# Altium PCB Delaytuning.PcbDoc
Units mm, origin at the board's own origin, x right, y up, seen from the top; angles counter-clockwise.
Board outline 152.4 x 101.6 mm, 6 copper layers (Top Layer, Int1 (GND), Int2 (Sign), Int3 (Sign), Int4 (PWR), Bottom Layer), stack 1.551 mm thick; 4 components, 20 nets, 40 pads, 58 vias.
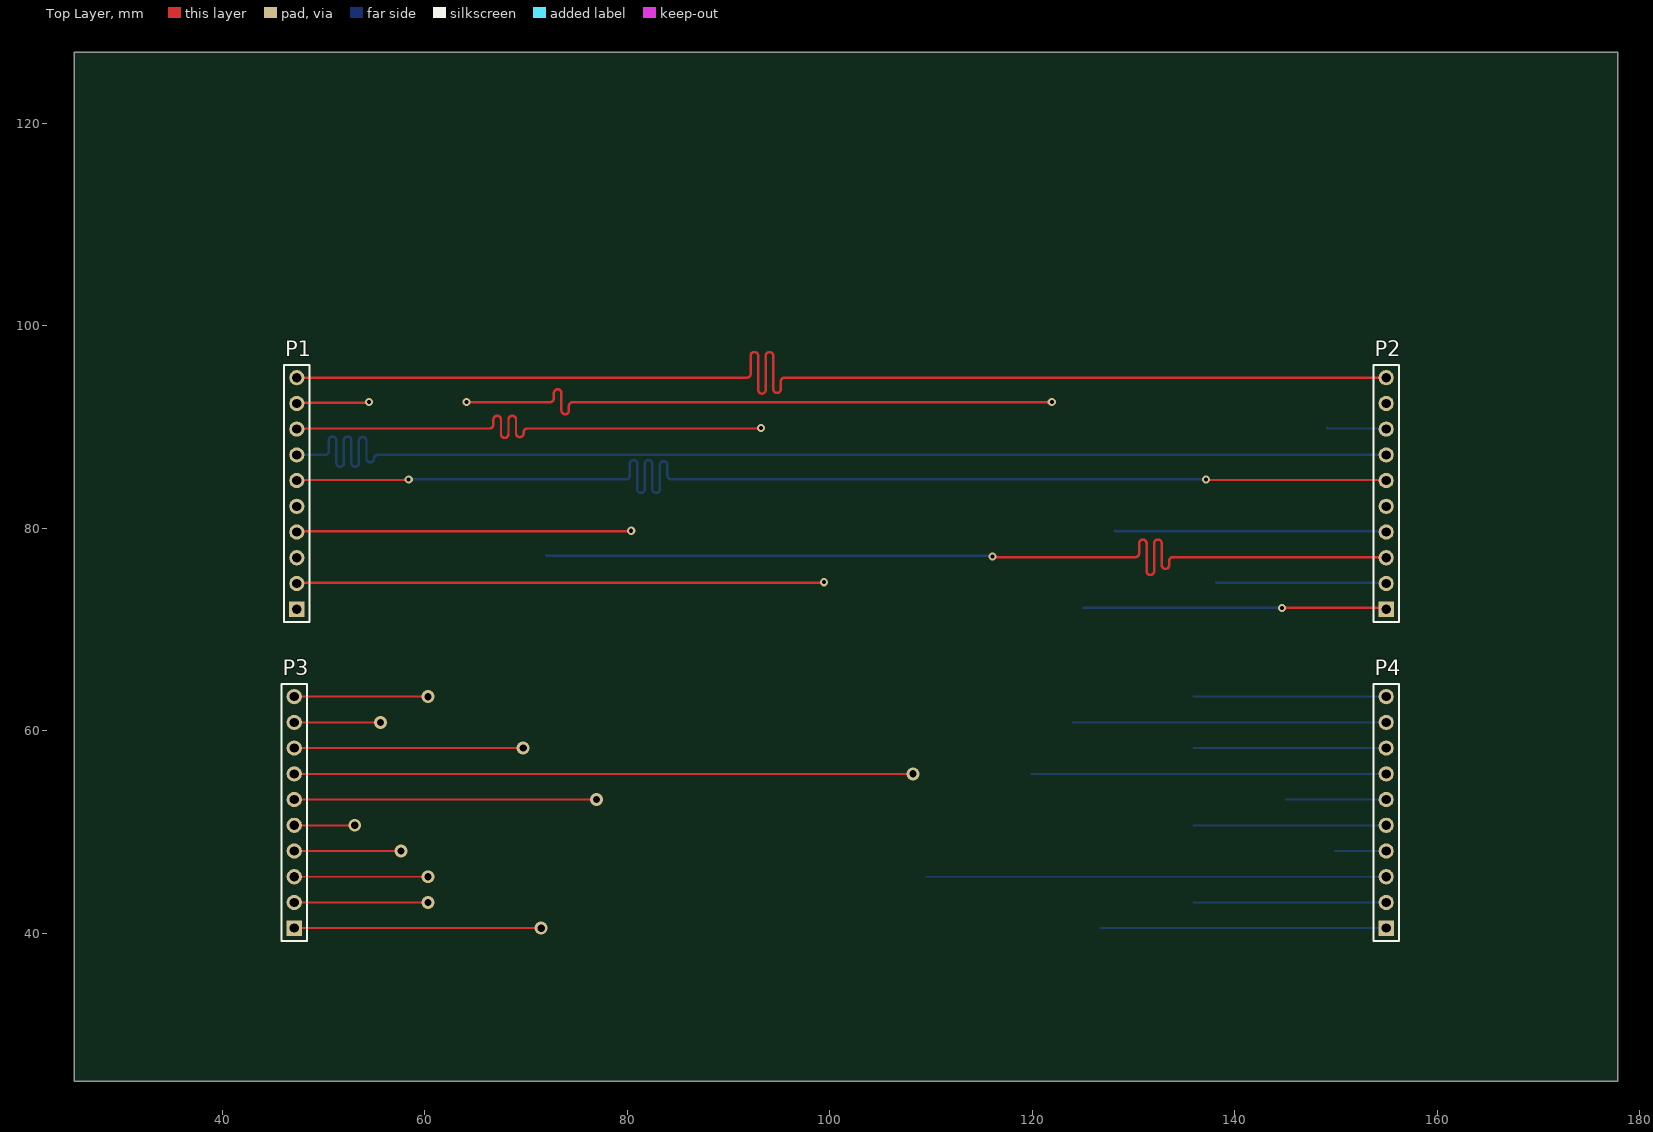
[diagram p0: Top Layer view]
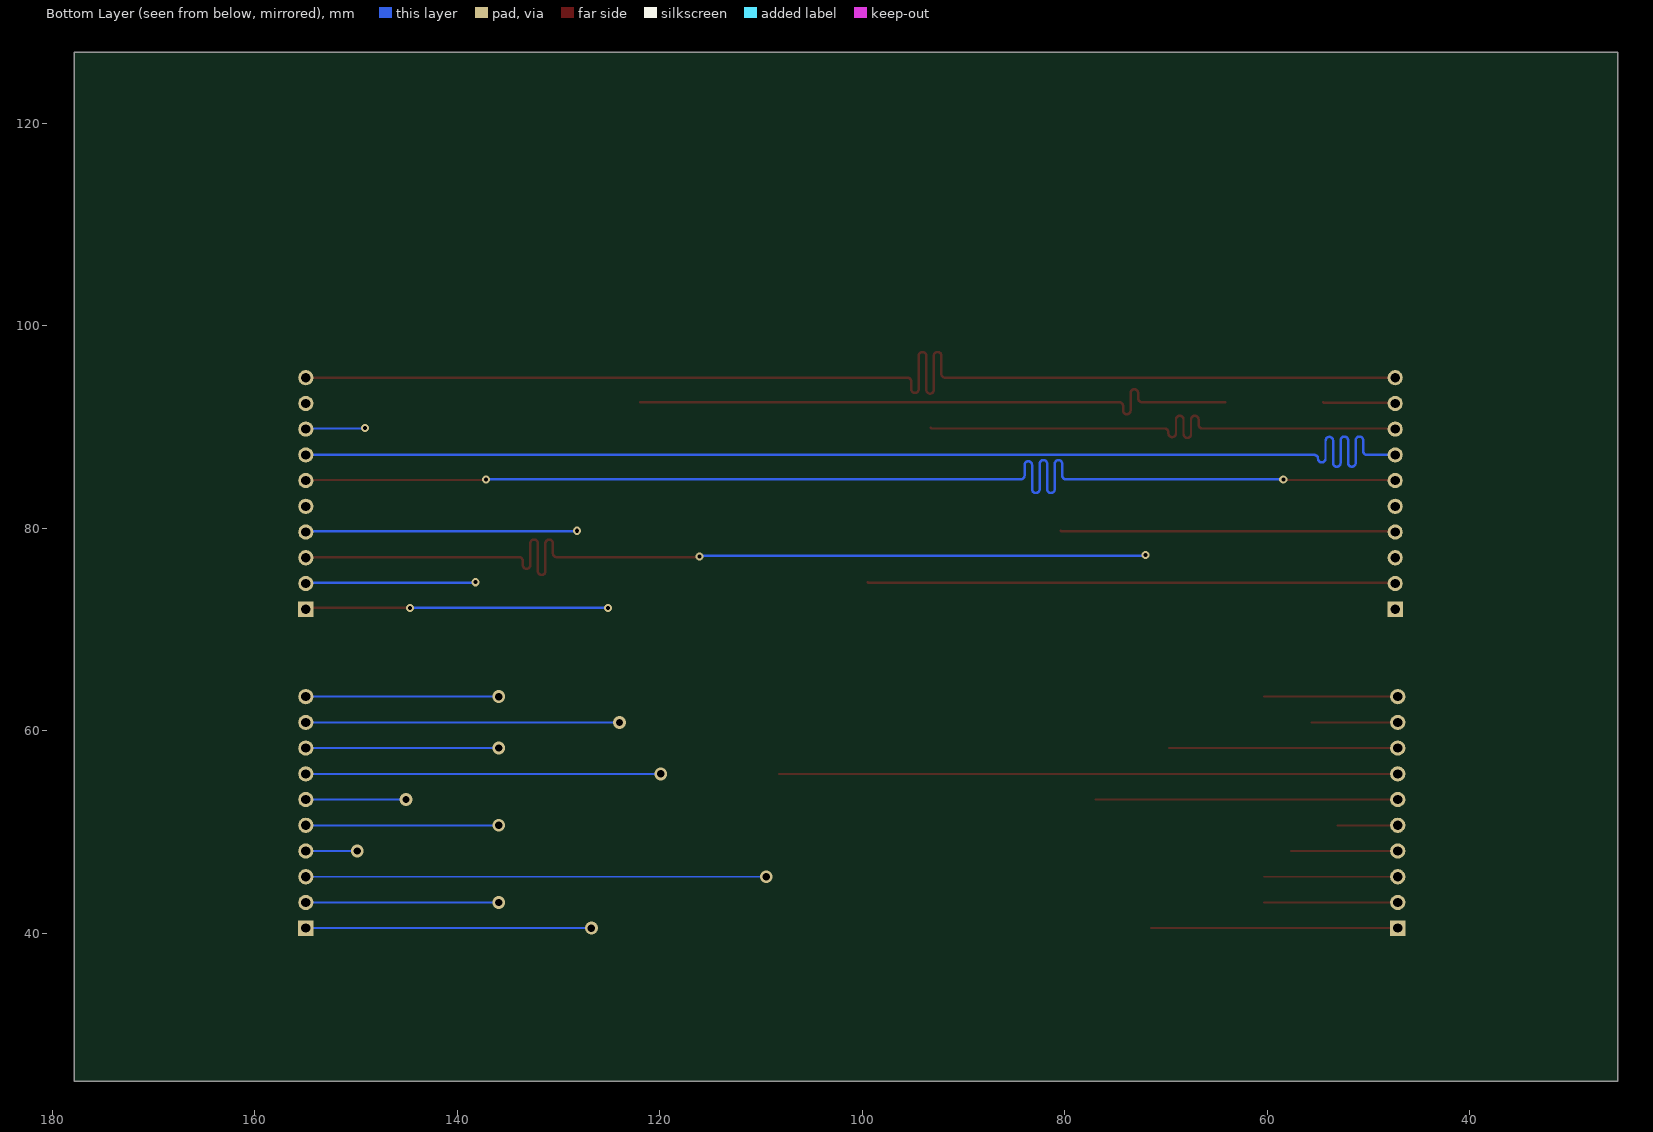
[diagram p1: Bottom Layer view, seen from below]
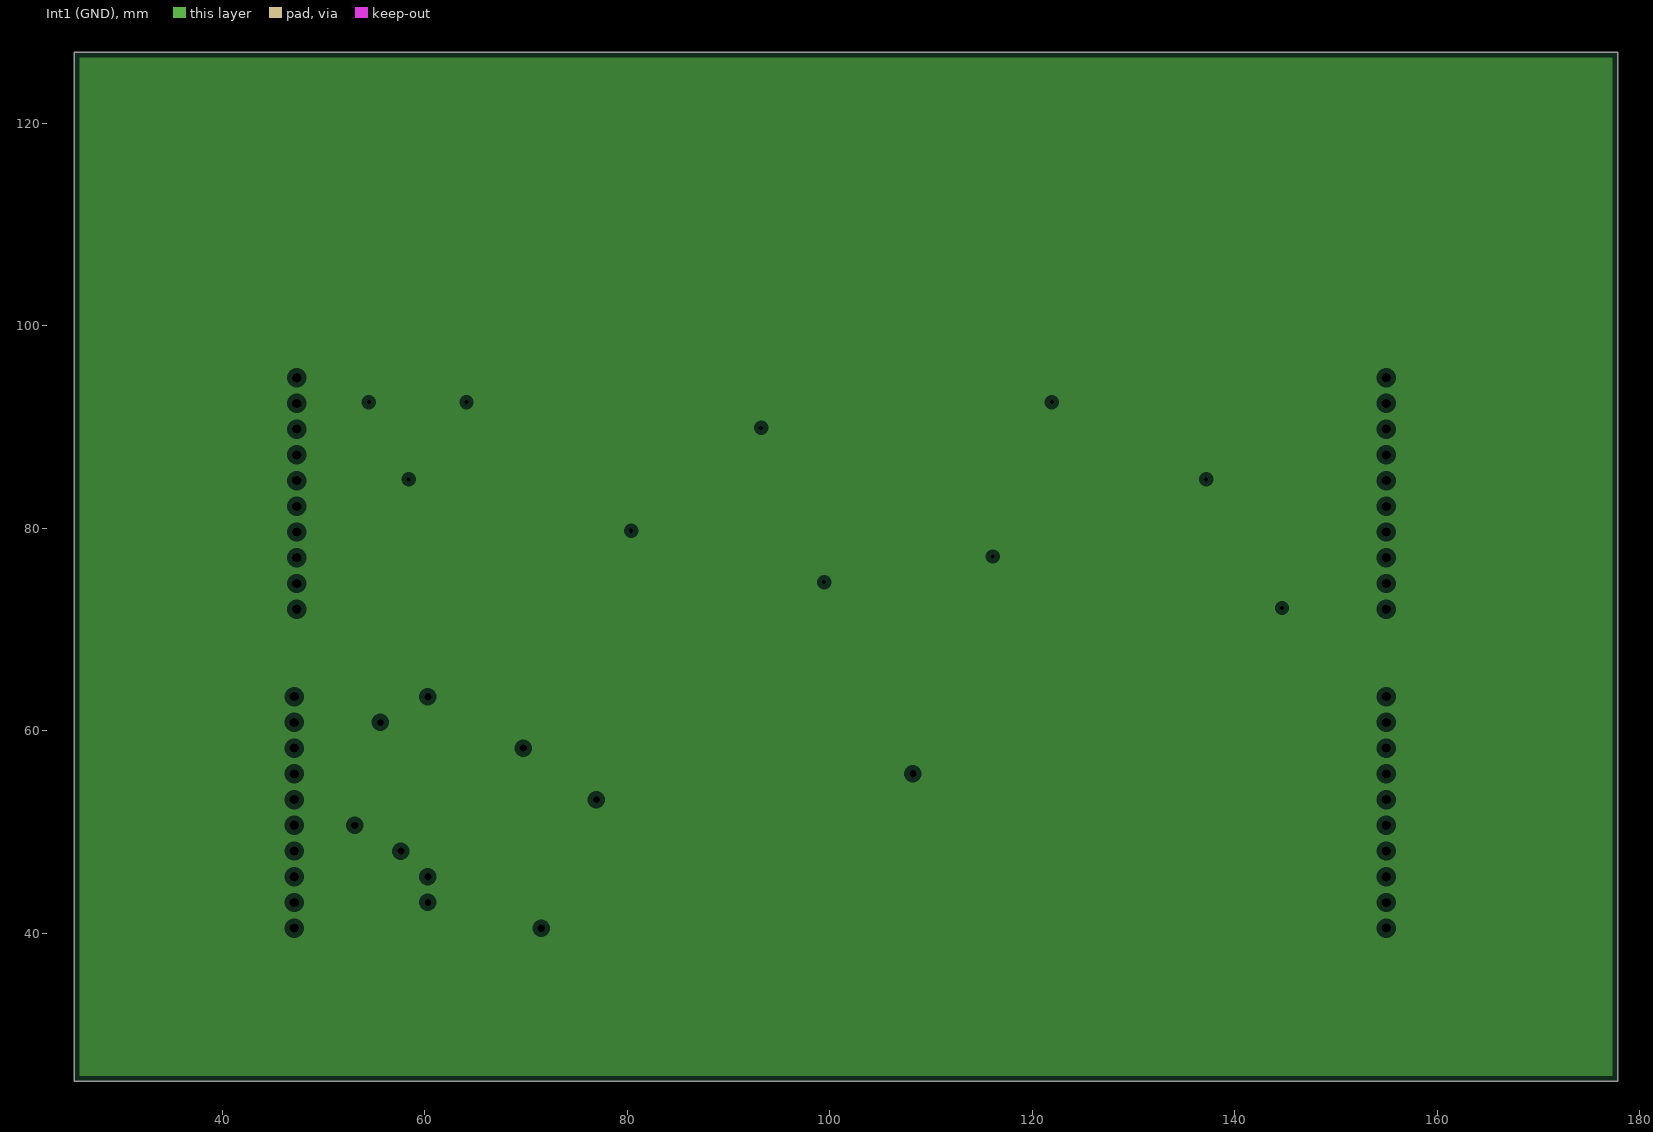
[diagram p2: Int1 (GND), clearances drawn from the general rule]
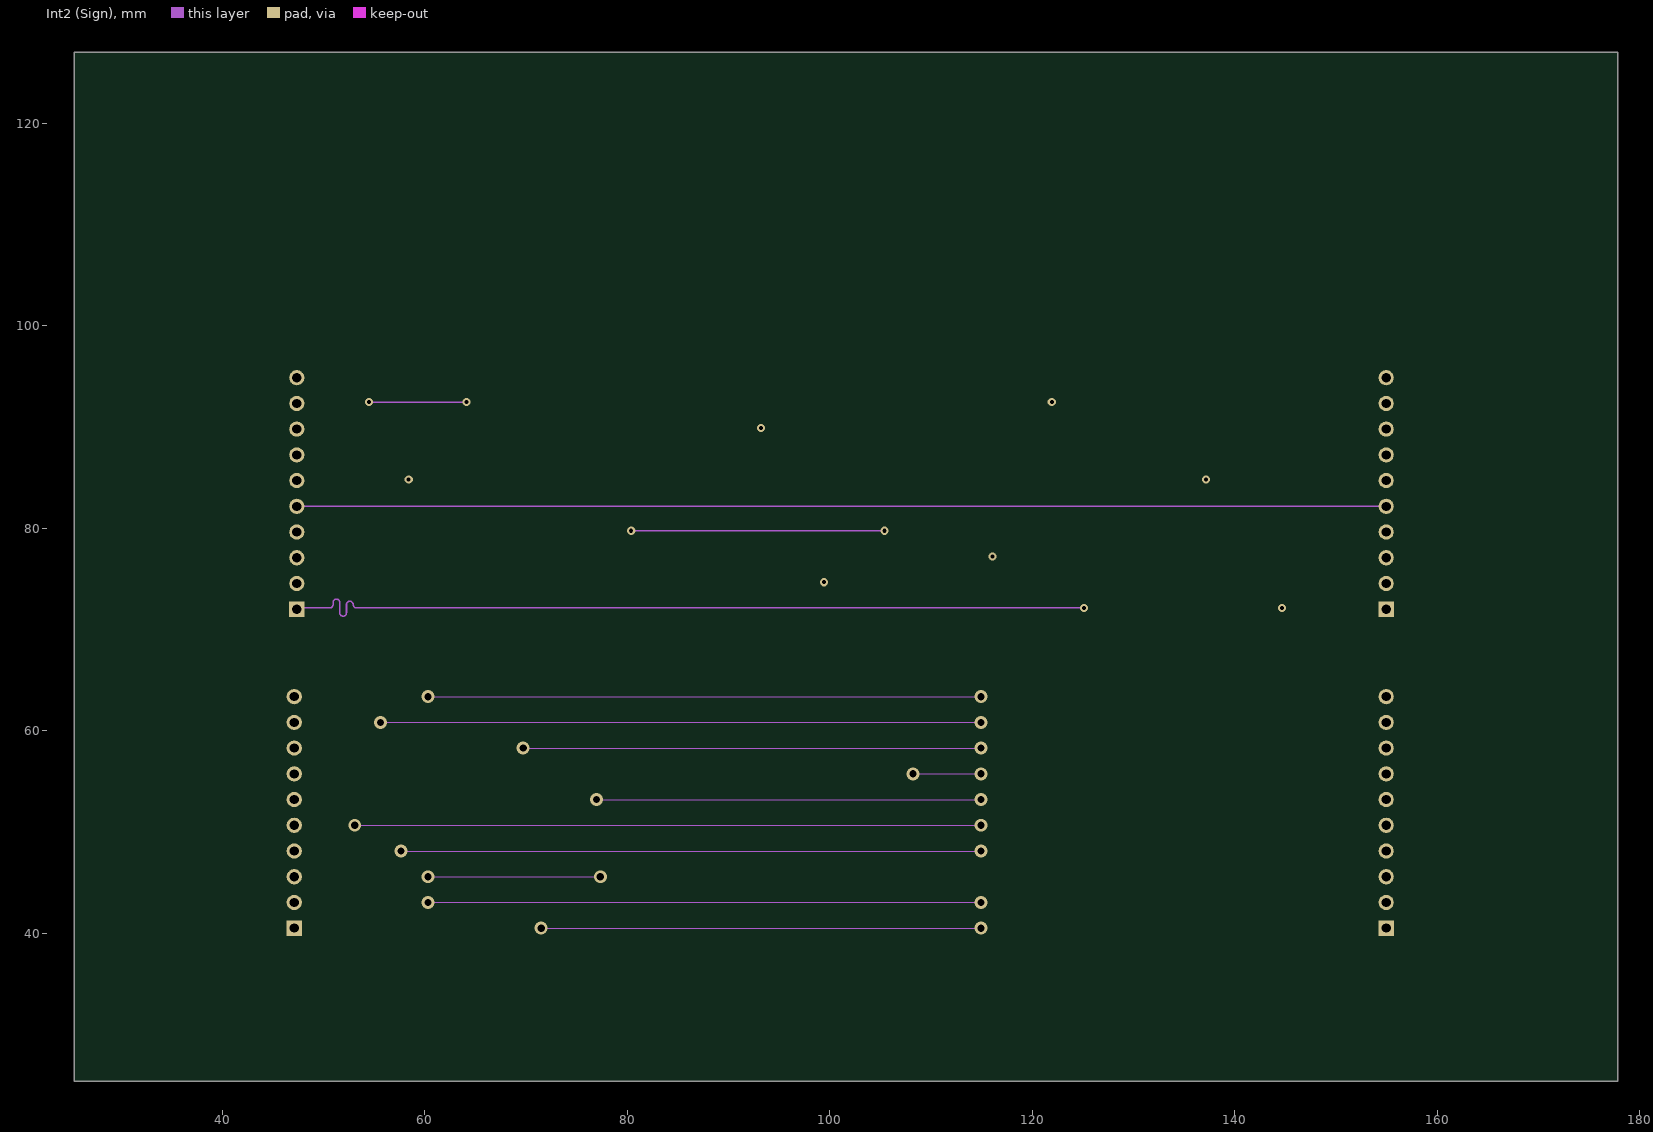
[diagram p3: Int2 (Sign)]
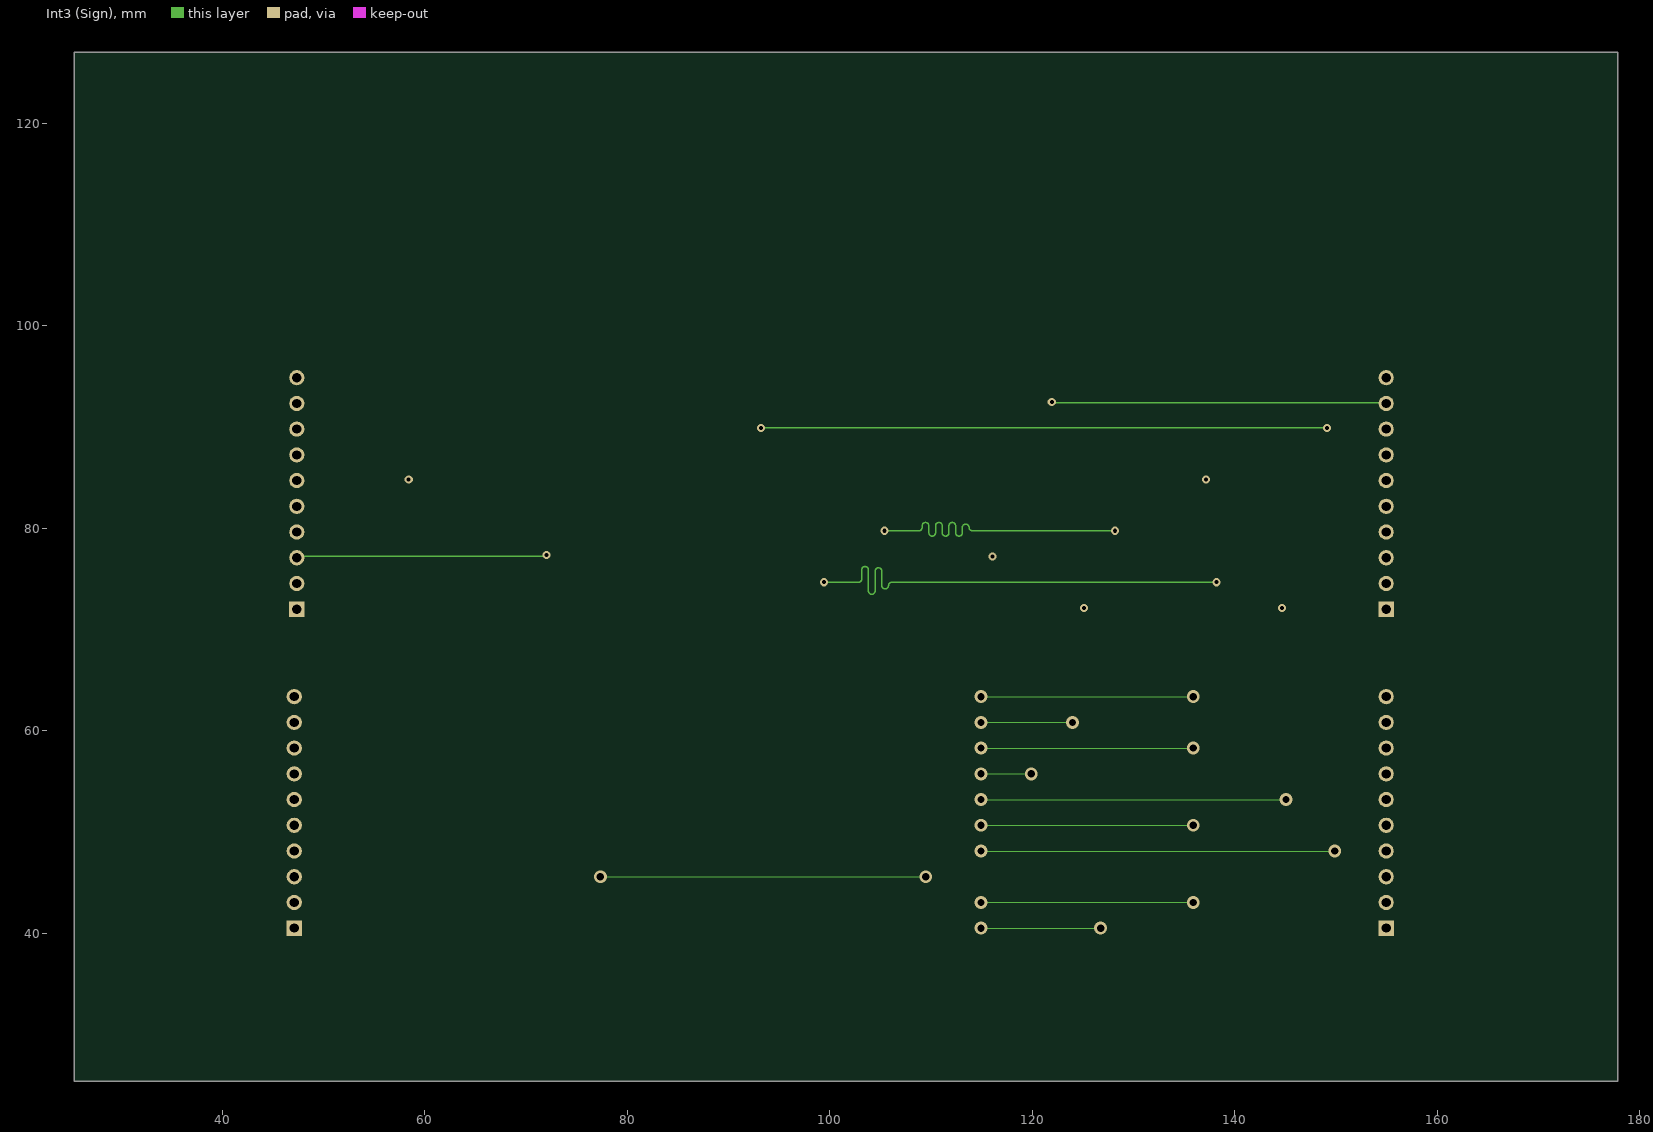
[diagram p4: Int3 (Sign)]
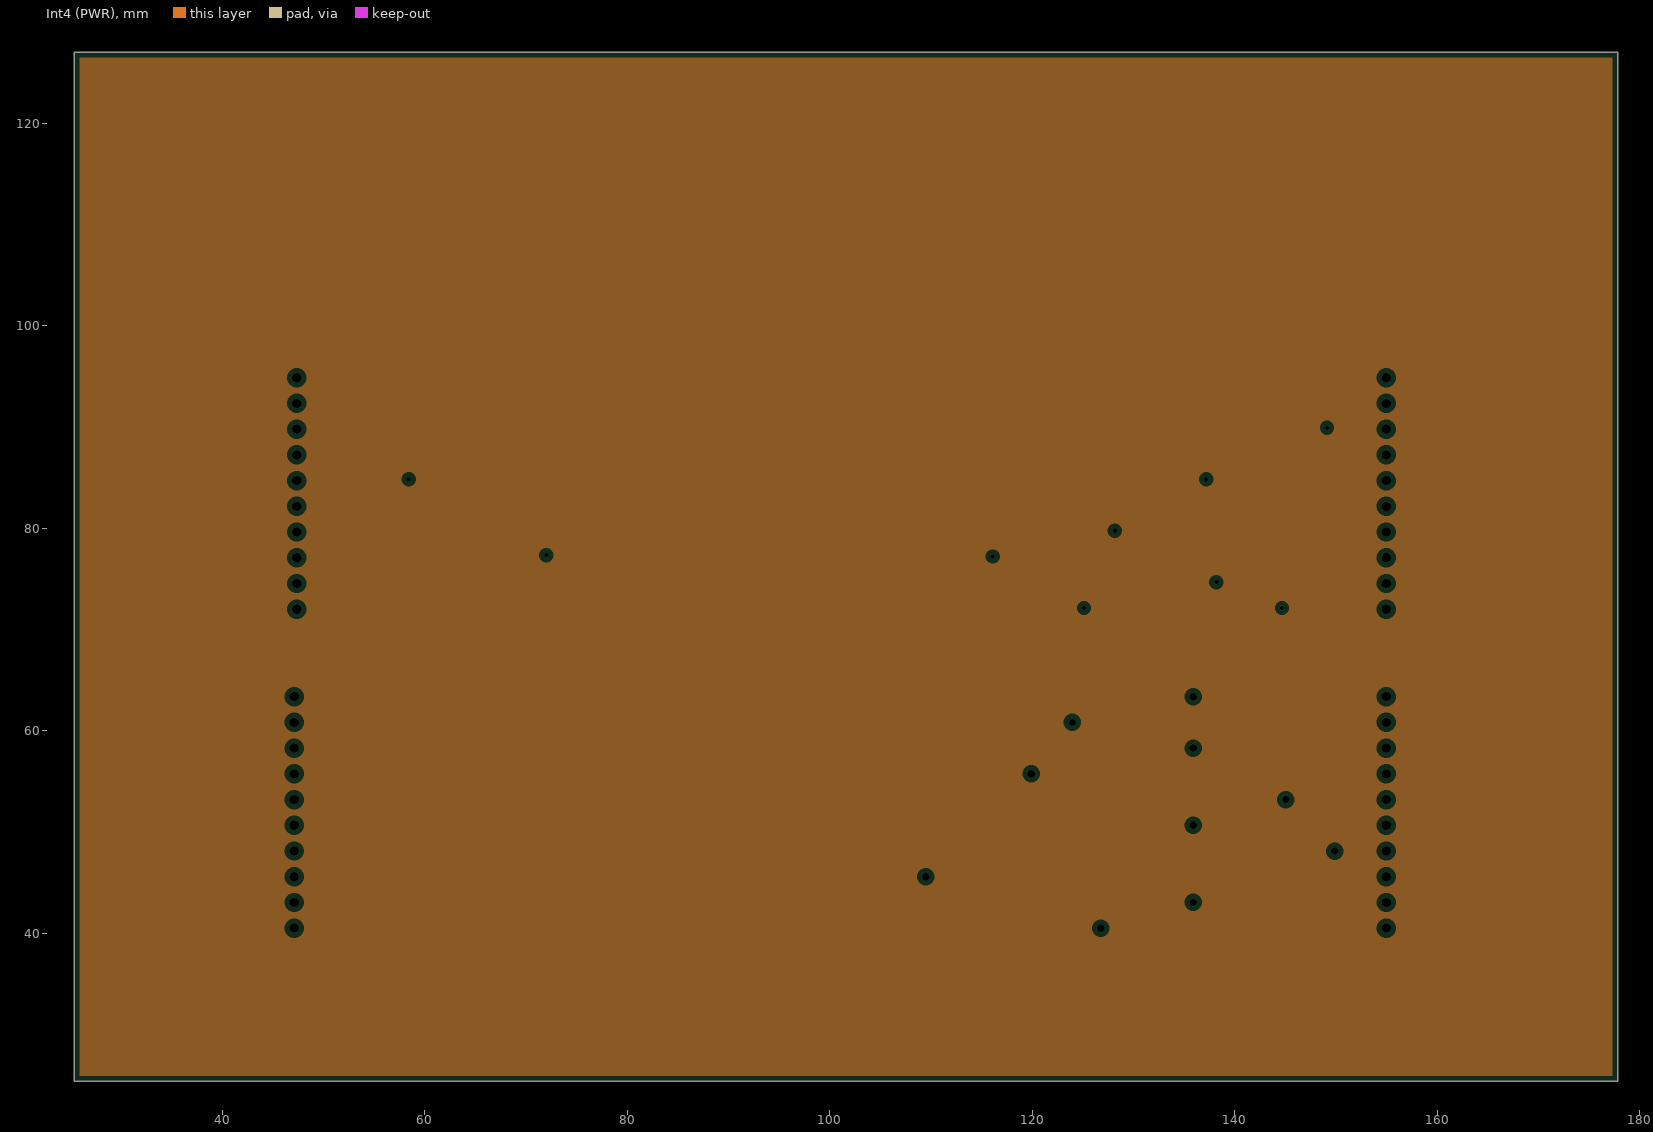
[diagram p5: Int4 (PWR), clearances drawn from the general rule]

## Layer stack, top to bottom
Top Solder: solder mask 0.0254, SM-001, Dk 4
Top Layer: signal copper 0.035
Dielectric 1: prepreg 0.0711, PP-006, Dk 4.1
Dielectric 2: prepreg 0.0711, PP-006, Dk 4.1
Int1 (GND): plane copper 0.035
Dielectric 3: core 0.4572, Core-035, Dk 4.7
Int2 (Sign): signal copper 0.035
Dielectric 4: prepreg 0.0711, PP-006, Dk 4.1
Dielectric 5: prepreg 0.0711, PP-006, Dk 4.1
Int3 (Sign): signal copper 0.035
Dielectric 6: core 0.4572, Core-035, Dk 4.7
Int4 (PWR): plane copper 0.035
Dielectric 7: prepreg 0.0711, PP-006, Dk 4.1
Dielectric 8: prepreg 0.0711, PP-006, Dk 4.1
Bottom Layer: signal copper 0.035
Bottom Solder: solder mask 0.0254, SM-001, Dk 4

## Board outline
25.4,25.4 177.8,25.4 177.8,127 25.4,127

## Design rules (kind name [scope] priority, off if disabled: settings)
Clearance [All] p1: gap=0.254 ignorepadtopadclearanceinfootprint=FALSE except(0: Arc-Hole Track-Hole SMDPad-Hole THPad-Hole Via-Hole Fill-Hole Poly-Hole Region-Hole Text-Hole)
MatchedLengths MatchedLengths_Data [InNetClass('Data')] p1: tolerance=0.1 checknetsindiffpair=FALSE checkdiffpairvsdiffpair=TRUE checkxsignals=TRUE checkothers=TRUE
MatchedLengths MatchedLengths_signals [InNetClass('Signal')] p2: tolerance=25.4 checknetsindiffpair=FALSE checkdiffpairvsdiffpair=TRUE checkxsignals=TRUE checkothers=TRUE usedelayunits=TRUE delaytolerance=1.000000
PlaneClearance [All] p1: clearance=0.508
PlaneConnect [All] p1: planeconnectstyle=Relief reliefexpansion=0.508 reliefentries=4 reliefconductorwidth=0.254 reliefairgap=0.254
PolygonConnect [All] p1: connectstyle=Relief reliefconductorwidth=0.254 reliefentries=4 polygonreliefangle="90 Angle" airgapwidth=0.254
RoutingVias RoutingVias_signal [InNetClass('Signal')] p1: holewidth=0.4 width=0.8 viastyle="Through Hole" minholewidth=0.4 minwidth=0.8 maxholewidth=0.4 maxwidth=0.8
RoutingVias [All] p2: holewidth=0.711 width=1.27 viastyle="Through Hole" minholewidth=0.711 minwidth=1.27 maxholewidth=0.711 maxwidth=1.27
SolderMaskExpansion [All] p1: expansion=0.102 istentingtop=FALSE
Width Width_55R [InNetClass('Data')] p1: maxlimit=0.193 minlimit=0.12 preferedwidth=0.193 toplayer_minwidth=0.193 midlayer1_maxwidth=0.12 midlayer1_prefwidth=0.12 midlayer2_maxwidth=0.12 midlayer2_prefwidth=0.12 bottomlayer_minwidth=0.193 impedanceprofiledriven=TRUE impedanceprofileid={515E0E0E-81E1-40F9-A996-25C9BB46C703} impedanceprofilevalue=55.000000 minimp=50.000000 maximp=50.000000 favimp=50.000000
Width Width_50R [InNetClass('Signal')] p2: maxlimit=0.237 minlimit=0.153 preferedwidth=0.237 toplayer_minwidth=0.237 midlayer1_maxwidth=0.153 midlayer1_prefwidth=0.153 midlayer2_maxwidth=0.153 midlayer2_prefwidth=0.153 bottomlayer_minwidth=0.237 impedanceprofiledriven=TRUE impedanceprofileid={C9C4D656-2BC5-496F-B6E6-F161D87A5B04} impedanceprofilevalue=50.000000 minimp=50.000000 maximp=50.000000 favimp=50.000000
Width [All] p3: maxlimit=0.254 minlimit=0.254 preferedwidth=0.254
28 further rules are at their usual default settings.

## Classes and differential pairs
net class Data: D1 D2 D3 D4 D5 D6 D7 D8 D9 D10
net class Signal: S1 S2 S3 S4 S5 S6 S7 S8 S9 S10

## Components (designator, comment, footprint, x,y, rotation, side; value= is the part's Value field where it differs from the comment)
P1 "Header 10" HDR1X10 47.371,72.009 r90 top
P2 "Header 10" HDR1X10 154.94,72.009 r90 top
P3 "Header 10" HDR1X10 47.117,40.513 r90 top
P4 "Header 10" HDR1X10 154.94,40.513 r90 top

## Footprints (in the part's own frame and the unit in brackets; to place one, negate y for a bottom-side part, rotate by r counter-clockwise, add the part's x,y. Pads: shape width x height; smd on the part's side, far side on the other; paste and mask are expansions set on the pad)
HDR1X10 [mm] "Connector; Header; 10 Position"
  rect 1.5x1.5 hole 0.9: 1(0,0)
  round 1.5 hole 0.9: 2(2.54,0) 3(5.08,0) 4(7.62,0) 5(10.16,0) 6(12.7,0) 7(15.24,0) 8(17.78,0) 9(20.32,0) 10(22.86,0)
  silkscreen extent -1.27,-1.27 24.13,1.27

## Part data
P1 P2 P3 P4: "Header, 10-Pin", LatestRevisionDate=17-Jul-2002, LatestRevisionNote="Re-released for DXP Platform.", Publisher="Altium Limited"

## Via types
v1: diameter 1.27, hole 0.711, Top Layer to Int2 (Sign), 10 vias
v2: diameter 1.27, hole 0.711, Int2 (Sign) to Int3 (Sign), 10 vias
v3: diameter 1.27, hole 0.711, Int3 (Sign) to Bottom Layer, 10 vias
v4: diameter 0.8, hole 0.4, Top Layer to Int2 (Sign), 10 vias
v5: diameter 0.8, hole 0.4, Int2 (Sign) to Int3 (Sign), 9 vias
v6: diameter 0.8, hole 0.4, Int3 (Sign) to Bottom Layer, 9 vias

## Nets (pads, with @x,y where several pads share a name; then routed paths per layer and width w, separated by ;. In a path a pad name is that pad's centre, name@x,y a point inside that pad or via, vN(x,y) a via of type N, cw(c..) or ccw(c..) an arc to the next point about the centre after c; other vN are vias at no path point)
D1: P3.1 P4.1 | length 107.8
  Top Layer w0.193: P3.1 v1(71.501,40.513)
  Int2 (Sign) w0.12: v1(71.501,40.513) v2(114.935,40.513)
  Int3 (Sign) w0.12: v2(114.935,40.513) v3(126.746,40.513)
  Bottom Layer w0.193: v3(126.746,40.513) P4.1
D2: P3.2 P4.2 | length 107.8
  Top Layer w0.193: P3.2 v1(60.325,43.053)
  Int2 (Sign) w0.12: v1(60.325,43.053) v2(114.935,43.053)
  Int3 (Sign) w0.12: v2(114.935,43.053) v3(135.89,43.053)
  Bottom Layer w0.193: v3(135.89,43.053) P4.2
D3: P3.3 P4.3 | length 107.8
  Top Layer w0.193: P3.3 v1(60.325,45.593)
  Int2 (Sign) w0.12: v1(60.325,45.593) v2(77.343,45.593)
  Int3 (Sign) w0.12: v2(77.343,45.593) v3(109.474,45.593)
  Bottom Layer w0.193: v3(109.474,45.593) P4.3
D4: P3.4 P4.4 | length 107.8
  Top Layer w0.193: P3.4 v1(57.658,48.133)
  Int2 (Sign) w0.12: v1(57.658,48.133) v2(114.935,48.133)
  Int3 (Sign) w0.12: v2(114.935,48.133) v3(149.86,48.133)
  Bottom Layer w0.193: v3(149.86,48.133) P4.4
D5: P3.5 P4.5 | length 107.8
  Top Layer w0.193: P3.5 v1(53.086,50.673)
  Int2 (Sign) w0.12: v1(53.086,50.673) v2(114.935,50.673)
  Int3 (Sign) w0.12: v2(114.935,50.673) v3(135.89,50.673)
  Bottom Layer w0.193: v3(135.89,50.673) P4.5
D6: P3.6 P4.6 | length 107.8
  Top Layer w0.193: P3.6 v1(76.962,53.213)
  Int2 (Sign) w0.12: v1(76.962,53.213) v2(114.935,53.213)
  Int3 (Sign) w0.12: v2(114.935,53.213) v3(145.034,53.213)
  Bottom Layer w0.193: v3(145.034,53.213) P4.6
D7: P3.7 P4.7 | length 107.8
  Top Layer w0.193: P3.7 v1(108.204,55.753)
  Int2 (Sign) w0.12: v1(108.204,55.753) v2(114.935,55.753)
  Int3 (Sign) w0.12: v2(114.935,55.753) v3(119.888,55.753)
  Bottom Layer w0.193: v3(119.888,55.753) P4.7
D8: P3.8 P4.8 | length 107.8
  Top Layer w0.193: P3.8 v1(69.723,58.293)
  Int2 (Sign) w0.12: v1(69.723,58.293) v2(114.935,58.293)
  Int3 (Sign) w0.12: v2(114.935,58.293) v3(135.89,58.293)
  Bottom Layer w0.193: v3(135.89,58.293) P4.8
D9: P3.9 P4.9 | length 107.8
  Top Layer w0.193: P3.9 v1(55.626,60.833)
  Int2 (Sign) w0.12: v1(55.626,60.833) v2(114.935,60.833)
  Int3 (Sign) w0.12: v2(114.935,60.833) v3(123.952,60.833)
  Bottom Layer w0.193: v3(123.952,60.833) P4.9
D10: P3.10 P4.10 | length 107.8
  Top Layer w0.193: P3.10 v1(60.325,63.373)
  Int2 (Sign) w0.12: v1(60.325,63.373) v2(114.935,63.373)
  Int3 (Sign) w0.12: v2(114.935,63.373) v3(135.89,63.373)
  Bottom Layer w0.193: v3(135.89,63.373) P4.10
S1: P1.1 P2.1 | length 111.2
  Top Layer w0.237: v6(144.653,72.136) 154.813,72.136 P2.1
  Int2 (Sign) w0.153: P1.1@47.371,72.136 50.546,72.136 50.623,72.136 ccw(c50.623,72.467) 50.953,72.467 50.953,72.675 cw(c51.284,72.675) 51.615,72.675 51.615,71.646 ccw(c51.945,71.646) 52.276,71.646 52.276,72.467 cw(c52.607,72.467) 52.937,72.467 ccw(c53.268,72.467) 53.268,72.136 56.05,72.136 v5(125.095,72.136)
  Bottom Layer w0.237: v5(125.095,72.136) v6(144.653,72.136)
  other v4: 144.653,72.136
  other v5: 144.653,72.136
  other v6: 125.095,72.136
S2: P1.2 P2.2 | length 115.9
  Top Layer w0.237: P1.2@47.371,74.676 47.434,74.612 99.377,74.612 v4(99.441,74.676)
  Int3 (Sign) w0.153: v4(99.441,74.676) 102.743,74.676 102.82,74.676 ccw(c102.82,75.007) 103.15,75.007 103.15,75.897 cw(c103.481,75.897) 103.812,75.897 103.812,73.81 ccw(c104.142,73.81) 104.473,73.81 104.473,75.762 cw(c104.804,75.762) 105.134,75.762 105.134,74.345 ccw(c105.465,74.345) 105.795,74.345 cw(c106.126,74.345) 106.126,74.676 107.627,74.676 v6(138.176,74.676)
  Bottom Layer w0.237: v6(138.176,74.676) 138.239,74.612 154.876,74.612 P2.2
  other v5: 99.441,74.676
S3: P1.3 P2.3 | length 118.9
  Top Layer w0.237: v6(116.078,77.216) 116.141,77.153 130.048,77.153 130.166,77.153 ccw(c130.166,77.525) 130.539,77.525 130.539,78.513 cw(c130.911,78.513) 131.283,78.513 131.283,75.757 ccw(c131.655,75.757) 132.028,75.757 132.028,78.513 cw(c132.4,78.513) 132.772,78.513 132.772,76.364 ccw(c133.144,76.364) 133.517,76.364 133.517,76.78 cw(c133.889,76.78) 133.889,77.153 136.309,77.153 154.876,77.153 P2.3
  Int3 (Sign) w0.153: P1.3@47.371,77.216 47.374,77.219 71.885,77.219 v6(72.009,77.343)
  Bottom Layer w0.237: v6(72.009,77.343) 72.072,77.279 116.014,77.279 v6(116.078,77.216)
  other v4: 116.078,77.216
  other v5: 116.078,77.216
S4: P1.4 P2.4 | length 114.8
  Top Layer w0.237: P1.4@47.371,79.756 47.434,79.692 80.328,79.692 v4(80.391,79.756)
  Int2 (Sign) w0.153: v4(80.391,79.756) v5(105.41,79.756)
  Int3 (Sign) w0.153: v5(105.41,79.756) 108.712,79.756 108.789,79.756 ccw(c108.789,80.087) 109.119,80.087 109.119,80.245 cw(c109.45,80.245) 109.781,80.245 109.781,79.556 ccw(c110.111,79.556) 110.442,79.556 110.442,80.245 cw(c110.773,80.245) 111.103,80.245 111.103,79.556 ccw(c111.434,79.556) 111.764,79.556 111.764,80.245 cw(c112.095,80.245) 112.426,80.245 112.426,79.56 ccw(c112.756,79.56) 113.087,79.56 113.087,80.087 cw(c113.418,80.087) 113.748,80.087 ccw(c114.079,80.087) 114.079,79.756 126.172,79.756 v6(128.143,79.756)
  Bottom Layer w0.237: v6(128.143,79.756) 128.207,79.692 154.876,79.692 P2.4
S5: P1.5 P2.5 | length 107.5
  Int2 (Sign) w0.153: P1.5@47.434,82.233 47.498,82.169 P2.5
S6: P1.6 P2.6 | length 122.3
  Top Layer w0.237: P1.6@47.371,84.836 47.434,84.772 58.356,84.772 v4(58.42,84.836) ; v6(137.16,84.836) 137.224,84.772 154.876,84.772 P2.6
  Bottom Layer w0.237: v4(58.42,84.836) 79.756,84.836 79.874,84.836 ccw(c79.874,85.208) 80.247,85.208 80.247,86.36 cw(c80.619,86.36) 80.991,86.36 80.991,83.853 ccw(c81.363,83.853) 81.736,83.853 81.736,86.36 cw(c82.108,86.36) 82.48,86.36 82.48,83.853 ccw(c82.852,83.853) 83.225,83.853 83.225,86.244 cw(c83.597,86.244) 83.969,86.244 83.969,85.208 ccw(c84.341,85.208) 84.341,84.836 87.432,84.836 v6(137.16,84.836)
  other v4: 137.16,84.836
  other v5: 58.42,84.836 137.16,84.836
  other v6: 58.42,84.836
S7: P1.7 P2.7 | length 122.2
  Bottom Layer w0.237: P1.7@47.434,87.312 47.498,87.249 50.038,87.249 50.156,87.249 ccw(c50.156,87.621) 50.529,87.621 50.529,88.686 cw(c50.901,88.686) 51.273,88.686 51.273,86.453 ccw(c51.645,86.453) 52.018,86.453 52.018,88.686 cw(c52.39,88.686) 52.762,88.686 52.762,86.453 ccw(c53.134,86.453) 53.507,86.453 53.507,88.65 cw(c53.879,88.65) 54.251,88.65 54.251,86.877 ccw(c54.623,86.877) 54.996,86.877 cw(c55.368,86.877) 55.368,87.249 62.955,87.249 P2.7
S8: P1.8 P2.8 | length 114.7
  Top Layer w0.237: P1.8@47.371,89.916 47.434,89.852 66.294,89.852 66.412,89.852 ccw(c66.412,90.225) 66.785,90.225 66.785,90.739 cw(c67.157,90.739) 67.529,90.739 67.529,89.288 ccw(c67.901,89.288) 68.274,89.288 68.274,90.739 cw(c68.646,90.739) 69.018,90.739 69.018,89.372 ccw(c69.39,89.372) 69.763,89.372 69.763,89.48 cw(c70.135,89.48) 70.135,89.852 85.344,89.852 93.154,89.852 v4(93.218,89.916)
  Int3 (Sign) w0.153: v4(93.218,89.916) v6(149.098,89.916)
  Bottom Layer w0.237: v6(149.098,89.916) 149.161,89.852 154.876,89.852 P2.8
  other v5: 93.218,89.916
S9: P1.9 P2.9 | length 111.6
  Top Layer w0.237: P1.9@47.371,92.456 47.434,92.392 54.419,92.392 v4(54.483,92.456) ; v4(64.135,92.456) 72.263,92.456 72.381,92.456 ccw(c72.381,92.828) 72.754,92.828 72.754,93.348 cw(c73.126,93.348) 73.498,93.348 73.498,91.632 ccw(c73.87,91.632) 74.243,91.632 74.243,92.084 cw(c74.615,92.084) 74.615,92.456 75.361,92.456 v5(121.92,92.456)
  Int2 (Sign) w0.153: v4(54.483,92.456) v4(64.135,92.456)
  Int3 (Sign) w0.153: v5(121.92,92.456) 121.983,92.392 154.876,92.392 P2.9
  other v4: 121.92,92.456
S10: P1.10 P2.10 | length 122.2
  Top Layer w0.237: P1.10@47.434,94.932 47.498,94.869 91.694,94.869 91.812,94.869 ccw(c91.812,95.241) 92.185,95.241 92.185,97.037 cw(c92.557,97.037) 92.929,97.037 92.929,93.674 ccw(c93.301,93.674) 93.674,93.674 93.674,97.037 cw(c94.046,97.037) 94.418,97.037 94.418,93.737 ccw(c94.79,93.737) 95.163,93.737 95.163,94.497 cw(c95.535,94.497) 95.535,94.869 106.573,94.869 P2.10

## Polygon pours and split planes (outlines as drawn)
no net on Int1 (GND) (split plane): 177.29,25.91 25.91,25.91 25.91,126.49 177.29,126.49
no net on Int4 (PWR) (split plane): 177.29,25.91 25.91,25.91 25.91,126.49 177.29,126.49